# EAGLE board purple_v2 (EAGLE 8.0.0)
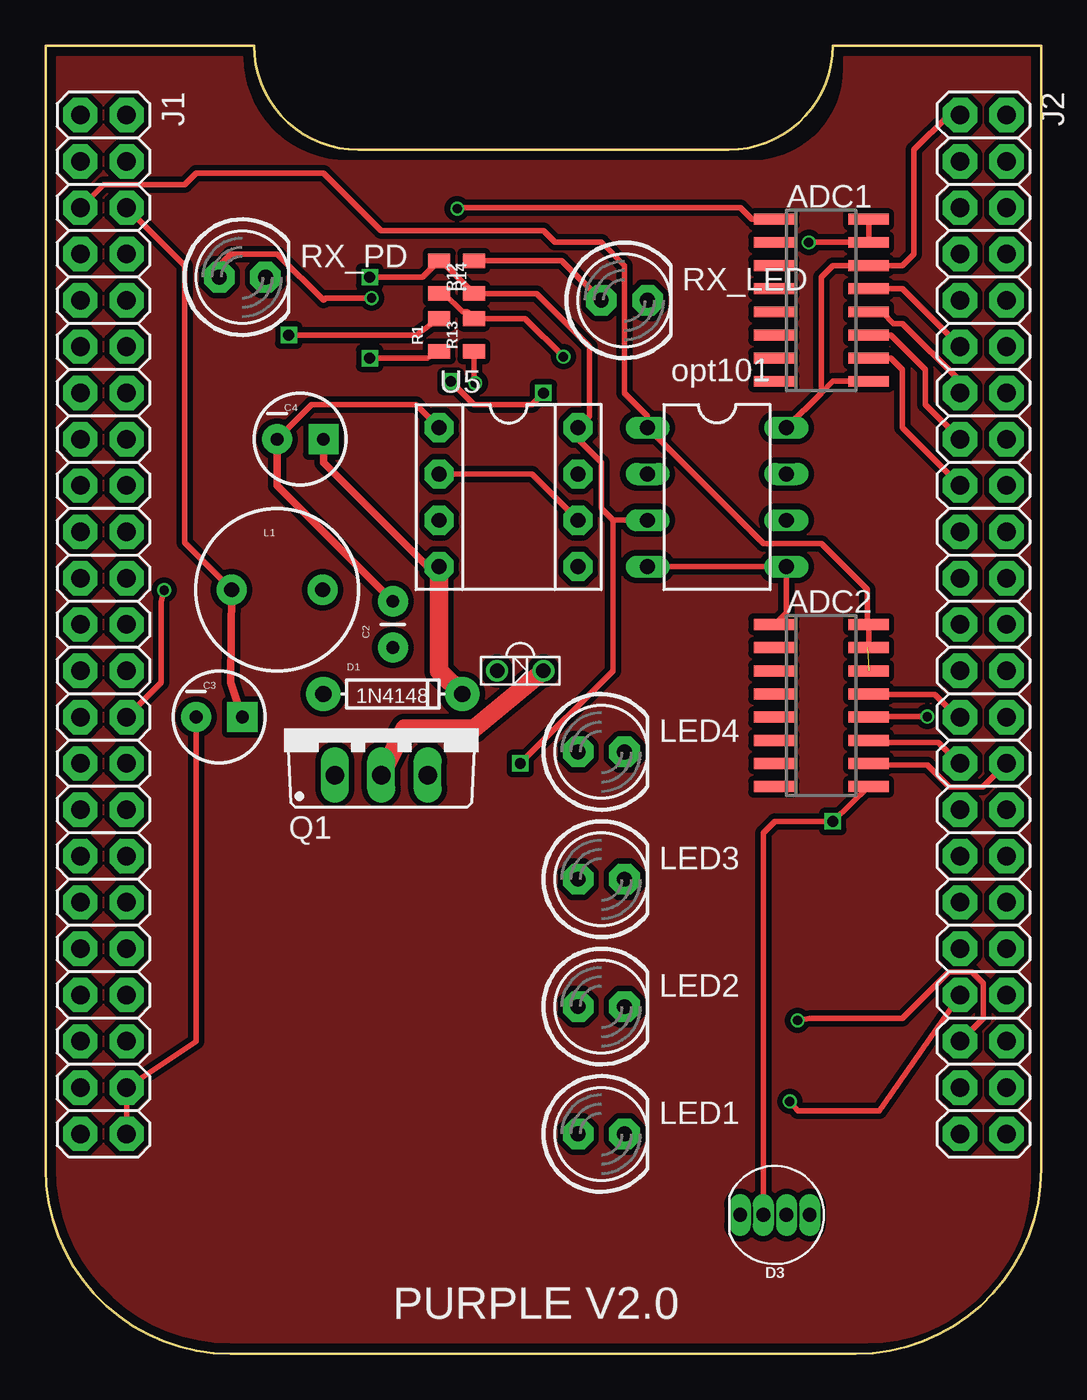
[diagram p0: board, top side]
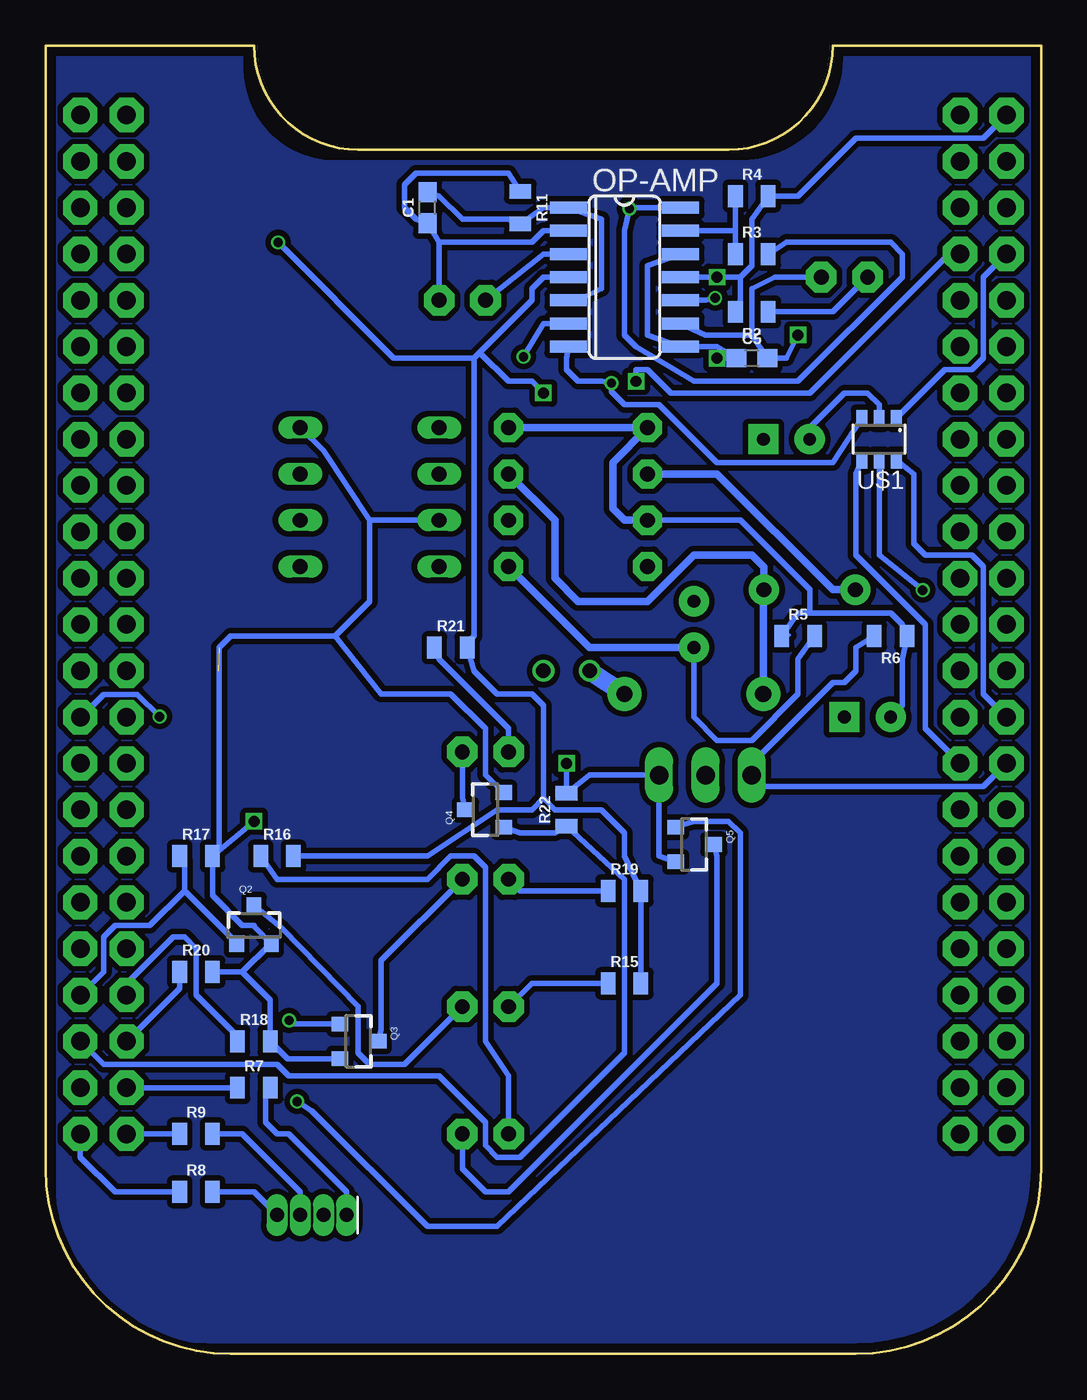
[diagram p1: board, bottom side, seen from below]

Size 54.61 x 71.75 mm. Coordinates in mm from the lower left corner, seen from the top.
Outline: 17.14,66.04 37.47,66.04 arc90 43.18,71.75 54.61,71.75 54.61,10.16 arc-90 44.45,0 10.16,0 arc-90 0,10.16 0,71.75 11.43,71.75 arc90 17.14,66.04
Copper layers (1*16): Top 0.035mm / dielectric 1.5mm / Bottom 0.035mm
Design rules "SparkFun *": minimum track width 8mil, minimum drill 20mil, track to track 8mil, track to pad 8mil, pad to pad 8mil, via to via 8mil, smd to smd 8mil, copper to edge 8mil, drill to drill 8mil, minimum pad ring 0mil, minimum via ring 5mil, stop-mask expansion 4mil, vias tented up to drill 20mil, thermal gap 10mil

## Footprints (pad centres in the part's own frame; a part is rotated, then mirrored left to right if it is on the bottom)
SO16 = smd 0.6 x 2.2: 1 -4.445,-2.6; 2 -3.175,-2.6; 3 -1.905,-2.6; 4 -0.635,-2.6; 5 0.635,-2.6; 6 1.905,-2.6; 7 3.175,-2.6; 8 4.445,-2.6; 9 4.445,2.6; 10 3.175,2.6; 11 1.905,2.6; 12 0.635,2.6; 13 -0.635,2.6; 14 -1.905,2.6; 15 -3.175,2.6; 16 -4.445,2.6
0603 = smd 1.1 x 1: 1 -0.85,0; 2 0.85,0
CAP-PTH-SMALL = drill 0.7 pad 1.651: 1 0,0; 2 2.54,0
CPOL-RADIAL-10UF-25V = drill 0.7 pad 1.651 square: 1 1.27,0 | drill 0.7 pad 1.651: 2 -1.27,0
DIODE-1N4148 = drill 0.9 pad 1.88: A -3.81,0; C 3.81,0
LTE-302 = drill 0.8: A 1.27,0; C -1.27,0
LED-RGB-THRU = drill 0.762 pad 0.889 long: 1 1.905,0; 2 0.635,0; 3 -0.635,0; 4 -1.905,0
2*23 = drill 1.016 pad 1.88 octagon: 1 -33.02,-1.27; 2 -33.02,1.27; 3 -30.48,-1.27; 4 -30.48,1.27; 5 -27.94,-1.27; 6 -27.94,1.27; 7 -25.4,-1.27; 8 -25.4,1.27; 9 -22.86,-1.27; 10 -22.86,1.27; 11 -20.32,-1.27; 12 -20.32,1.27; 13 -17.78,-1.27; 14 -17.78,1.27; 15 -15.24,-1.27; 16 -15.24,1.27; 17 -12.7,-1.27; 18 -12.7,1.27; 19 -10.16,-1.27; 20 -10.16,1.27; 21 -7.62,-1.27; 22 -7.62,1.27; 23 -5.08,-1.27; 24 -5.08,1.27; 25 -2.54,-1.27; 26 -2.54,1.27; 27 0,-1.27; 28 0,1.27; 29 2.54,-1.27; 30 2.54,1.27; 31 5.08,-1.27; 32 5.08,1.27; 33 7.62,-1.27; 34 7.62,1.27; 35 10.16,-1.27; 36 10.16,1.27; 37 12.7,-1.27; 38 12.7,1.27; 39 15.24,-1.27; 40 15.24,1.27; 41 17.78,-1.27; 42 17.78,1.27; 43 20.32,-1.27; 44 20.32,1.27; 45 22.86,-1.27; 46 22.86,1.27
RLB0912 = drill 0.813 pad 1.651: 1 2.502,0; 2 -2.502,0
LED5MM = drill 0.813 pad 1.676 octagon: A -1.27,0; K 1.27,0
SO14 = smd 0.66 x 2.032: 1 -3.81,-3.073; 2 -2.54,-3.073; 3 -1.27,-3.073; 4 0,-3.073; 5 1.27,-3.073; 6 2.54,-3.073; 7 3.81,-3.073; 8 3.81,3.073; 9 2.54,3.073; 10 1.27,3.073; 11 0,3.073; 12 -1.27,3.073; 13 -2.54,3.073; 14 -3.81,3.073
TO220BV = drill 1.016 long: D 0,-2.54; G -2.54,-2.54; S 2.54,-2.54
SOT23-3 = smd 0.8 x 0.9: 1 -0.95,-1; 2 0.95,-1; 3 0,1.1
0805 = smd 0.8 x 1.2: 1 -0.9,0; 2 0.9,0
DIL08 = drill 0.813 pad 1.6 octagon: 1 -3.81,-3.81; 2 -1.27,-3.81; 3 1.27,-3.81; 4 3.81,-3.81; 5 3.81,3.81; 6 1.27,3.81; 7 -1.27,3.81; 8 -3.81,3.81
OPT101 = drill 0.813 long: 1 -3.81,3.81; 2 -3.81,1.27; 3 -3.81,-1.27; 4 -3.81,-3.81; 5 3.81,-3.81; 6 3.81,-1.27; 7 3.81,1.27; 8 3.81,3.81
SOT23-6 = smd 0.6 x 0.9: 1 -0.95,-1.15; 2 0,-1.15; 3 0.95,-1.15; 4 0.95,1.15; 5 0,1.15; 6 -0.95,1.15

## Placement (x,y rotation side)
ADC1  MCP3008-SO16  [SO16]  42.55,57.78 270 top
ADC2  MCP3008-SO16  [SO16]  42.55,35.56 270 top
C1  10pF  [0603]  33.66,62.87 90 bottom
C2  0.1uF  [CAP-PTH-SMALL]  19.05,38.73 90 top
C3  47uF  [CPOL-RADIAL-10UF-25V]  9.53,34.92 0 top
C4  33uF  [CPOL-RADIAL-10UF-25V]  13.97,50.16 0 top
C5  10pF  [0603]  15.88,54.61 0 bottom
D1  1N4148  [DIODE-1N4148]  19.05,36.2 0 top
D2  High Power LED  [LTE-302]  26.04,37.47 180 top
D3  CLEAR  [LED-RGB-THRU]  40.01,7.62 180 top
FRAME1  [DUMMY]  0,-0.64 0 top
J1  [2*23]  3.17,34.92 270 top
J2  [2*23]  51.44,34.92 270 top
L1  33uH  [RLB0912]  12.7,41.91 0 top
LED1  [LED5MM]  30.48,12.06 0 top
LED2  [LED5MM]  30.48,19.05 0 top
LED3  [LED5MM]  30.48,26.04 0 top
LED4  [LED5MM]  30.48,33.02 0 top
OP-AMP  TLC2274-SO14  [SO14]  22.86,59.05 270 bottom
Q1  IRF520  [TO220BV]  18.41,34.29 0 top
Q2  MOSFET-PCHANNEL  [SOT23-3]  43.18,23.5 0 bottom
Q3  MOSFET-PCHANNEL  [SOT23-3]  37.47,17.14 270 bottom
Q4  MOSFET-PCHANNEL  [SOT23-3]  30.48,29.84 90 bottom
Q5  MOSFET-PCHANNEL  [SOT23-3]  19.05,27.94 270 bottom
R1  220K  [0805]  21.59,55.88 90 top
R2  1K  [0805]  15.88,57.15 180 bottom
R3  10K  [0805]  15.88,60.33 0 bottom
R4  1K  [0805]  15.88,63.5 0 bottom
R5  1M  [0805]  13.34,39.37 0 bottom
R6  10K  [0805]  8.26,39.37 180 bottom
R7  100  [0805]  43.18,14.61 0 bottom
R8  100  [0805]  46.35,8.89 0 bottom
R9  100  [0805]  46.35,12.06 0 bottom
R11  220K  [0805]  28.57,62.87 270 bottom
R12  1K  [0805]  23.5,59.05 90 top
R13  10K  [0805]  23.5,55.88 90 top
R14  1K  [0805]  21.59,59.05 270 top
R15  400  [0805]  22.86,20.32 0 bottom
R16  400  [0805]  41.91,27.3 0 bottom
R17  100K  [0805]  46.35,27.3 0 bottom
R18  100K  [0805]  43.18,17.14 0 bottom
R19  400  [0805]  22.86,25.4 0 bottom
R20  100K  [0805]  46.35,20.95 0 bottom
R21  400  [0805]  32.38,38.73 0 bottom
R22  100K  [0805]  26.04,29.84 90 bottom
RX_LED  [LED5MM]  31.75,57.78 0 top
RX_PD  [LED5MM]  10.79,59.05 0 top
U5  [DIL08]  25.4,46.99 270 top
U9  [OPT101]  36.83,46.99 0 top
U$1  ADS7883  [SOT23-6]  8.89,50.16 180 bottom

## Library data of the parts
ADC1 ADC2 LED1-LED4 OP-AMP RX_LED RX_PD = adafruit
C1 C5 = SparkFun-Capacitors; PROD_ID: CAP-11812
C2-C4 = SparkFun-Capacitors
D1 = SparkFun-DiscreteSemi
D2 = SparkFun-LED
D3 = SparkFun-LED; PROD_ID: DIO-08418
FRAME1 = SparkFun-Aesthetics; DESIGNER: Nobody; VERSION: v01
J1 J2 = header
L1 = SparkFun-Passives
Q1 = transistor-power
Q2-Q5 = User-Submitted; PROD_ID: TRANS-08285
R1-R9 R11-R22 = SparkFun-Resistors; PROD_ID: RES-11622
U5 = SparkFun-DigitalIC
U9 = TCL272
U$1 = vlc

## Nets
2IN+: C1.2 OP-AMP.1 OP-AMP.5 R11.2
4IN+: C5.1 OP-AMP.8 OP-AMP.12 R1.1
CH0: ADC1.1 OP-AMP.14 R3.2
CLK_1: ADC1.13 J2.11
CLK_PRU: J1.30 U$1.4
CS_1: ADC1.10 J2.17
CS_P8_30: ADC2.10 J2.30
CS_PRU: J1.27 U$1.6
DIN_1: ADC1.11 J2.15
DOUT_1: ADC1.12 J2.13
GND: ADC1.9 ADC1.14 ADC2.9 ADC2.14 C2.2 C3.2 C4.2 D3.2 J1.1 J1.44 J1.46 J2.1 OP-AMP.11 Q1.S Q2.2 Q3.2 Q4.2 Q5.2 R2.2 R4.2 R5.1 R6.1 R12.1 R14.1 R17.2 R18.2 R20.2 R22.2 U5.1 U5.3 U5.8 U9.3 U9.8 U$1.2
HP_LED: J1.29 Q1.G R6.2
MISO_P8_28: ADC2.12 J2.28
MISO_PRU: J1.28 U$1.5
MOSI_P8_29: ADC2.11 J2.29
N$1: D3.1 R7.2
N$2: OP-AMP.13 R3.1 R4.1
N$3: D3.4 R8.2
N$4: D3.3 R9.2
N$5: OP-AMP.10 R2.1 RX_PD.A
N$6: C5.2 OP-AMP.9 R1.2 RX_PD.K
N$8: C1.1 OP-AMP.2 R11.1 RX_LED.K
N$9: LED2.A R15.1
N$10: OP-AMP.3 R12.2 RX_LED.A
N$11: OP-AMP.6 R13.2 R14.2
N$12: LED1.A R16.1
N$13: D2.C Q1.D
N$14: ADC2.1 U9.4 U9.5
N$15: LED2.K Q2.3
N$16: LED1.K Q5.3
N$17: LED3.A R19.1
N$18: D1.A L1.1 U5.7
N$19: C4.1 D1.C D2.A U5.4
N$20: C2.1 R5.2 U5.5
N$21: LED3.K Q3.3
N$22: LED4.A R21.1
N$23: LED4.K Q4.3
P9_5: ADC2.15 ADC2.16 J1.5 U9.1
P9_6: C3.1 J1.6 L1.2 U5.2 U5.6
P9_7: J1.7 U$1.1
P9_8: ADC1.15 ADC1.16 J1.8 OP-AMP.4 R15.2 R16.2 R19.2 R21.2
RGB_B: J2.46 R8.1
RGB_G: J2.45 R9.1
RGB_R: J2.43 R7.1
SCLK_P8_27: ADC2.13 J2.27
TXLED1: J2.39 Q5.1 R18.1
TXLED2: J2.40 Q2.1 R17.1
TXLED3: J2.41 Q3.1 R20.1
TXLED4: J2.42 Q4.1 R22.1
VIN: OP-AMP.7 R13.1 U$1.3

## Tracks (layer width: path | path; a pad name or v marks a point on that pad's centre or on a via)
2IN+
  Bottom 0.203: 25.2,57.91 25.81,57.91 OP-AMP.5 | 25.2,62.79 25.81,62.79 OP-AMP.1
  Bottom 0.305: 25.2,57.91 24.13,58.42 24.13,62.23 OP-AMP.1 27.3,62.87 R11.2 29.21,62.23 31.75,62.23 33.02,63.5 C1.2
4IN+  (via drill 0.6)
  Top 0.305: R1.1 20.95,54.61 v17.78,54.61
  Bottom 0.305: OP-AMP.12 21.59,59.69 21.59,55.88 OP-AMP.8 17.78,55.24 C5.1 v17.78,54.61
CH0  (via drill 0.51)
  Top 0.203: ADC1.1 39.83,62.18
  Top 0.305: v22.58,62.81 22.63,62.87 38.1,62.87 38.73,62.23 ADC1.1
  Bottom 0.203: 20.52,62.79 19.91,62.79 OP-AMP.14 | 14.83,60.35 R3.2
  Bottom 0.305: R3.2 13.97,60.96 8.26,60.96 7.62,60.33 7.62,59.05 13.34,53.34 19.05,53.34 22.23,55.24 22.86,55.88 22.86,61.59 v22.58,62.81 22.23,62.87 OP-AMP.14
CLK_1
  Top 0.203: 45.31,58.32 ADC1.13
  Top 0.305: ADC1.13 46.99,58.42 J2.11
CLK_PRU
  Bottom 0.305: J1.30 6.35,34.29 6.35,40.01 10.16,43.81 10.16,48.26 U$1.4
CS_1
  Top 0.305: ADC1.10 46.35,54.61 46.99,53.98 46.99,50.8 J2.17
CS_P8_30
  Top 0.203: 45.31,32.31 ADC2.10
  Top 0.305: 45.31,32.31 48.36,32.31 49.58,31.09 51.41,31.09 J2.30
CS_PRU
  Bottom 0.203: U$1.6 7.92,48.97
  Bottom 0.305: J1.27 3.17,36.2 3.17,43.18 3.81,43.81 6.35,43.81 6.99,44.45 6.99,48.26 U$1.6
DIN_1
  Top 0.305: ADC1.11 46.35,55.88 48.26,53.98 48.26,52.07 J2.15
DOUT_1
  Top 0.203: 45.92,57.1 45.31,57.1 ADC1.12
  Top 0.305: J2.13 50.16,53.34 46.99,56.52 46.51,56.52 45.92,57.1
GND  (via drill 0.6)  (1 unrouted)
  Top 0.203: 45.11,53.24 ADC1.9 | 44.3,59.54 45.11,59.54 ADC1.14 45.31,59.74 45.92,59.74 | 21.74,59.94 R14.1 21.54,60.15 | 23.37,58.32 R12.1 23.57,58.12 | 12.8,50.19 C4.2 | U5.1 21.54,50.8 | 29.26,50.8 U5.8
  Top 0.305: v17.78,59.05 20.69,59.05 R14.1 21.7,59.95 R12.1 26.93,58.16 29.84,55.24 29.84,51.44 U5.8 29.21,50.16 30.48,48.9 30.48,46.35 31.11,45.72 | U5.1 20.32,52.07 14.61,52.07 C4.2 | 31.11,45.72 U9.3 | J2.1 49.53,67.94 47.62,66.04 47.62,60.33 46.99,59.69 ADC1.14 43.18,59.69 42.55,59.05 42.55,52.7 | ADC1.9 43.18,53.34 42.55,52.7 | 42.55,52.7 U9.8 | ADC2.9 v43.18,29.21 40.01,29.21 39.37,28.57 D3.2 | C3.2 8.26,17.14 J1.44 J1.46 | v26.04,32.38 31.11,37.47 31.11,45.72
  Top 0.406: C2.2 12.7,47.62 C4.2
  Bottom 0.203: 38.61,16.26 Q3.2 | 42.27,17.07 R18.2 42.47,17.27 | R20.2 45.31,21.13 | 45.31,27.23 R17.2 45.31,27.43 | 7.52,39.22 R6.1 | 13.82,39.42 14.22,39.42 R5.1 | 42.47,22.35 42.27,22.35 Q2.2 42.47,22.35
  Bottom 0.305: U$1.2 8.89,52.07 9.53,52.7 10.79,52.7 12.7,50.8 C4.2 | R17.2 45.45,25.14 43.81,23.5 43.18,23.5 43.18,23.45 Q2.2 42.27,22.5 43.81,20.95 | 43.81,20.95 R20.2 | 43.81,20.95 42.28,19.42 R18.2 41.33,16.2 Q3.2 | Q5.2 20.95,27.3 Q1.S 24.77,31.75 R22.2 v26.04,32.38 | C3.2 7.62,35.56 7.62,38.1 R6.1 7.62,40.01 8.26,40.64 12.7,40.64 | R5.1 13.34,40.64 12.7,40.64 | 12.7,40.64 12.7,41.91 16.51,45.72 U5.3 | 36.83,45.72 U9.3 | 36.83,45.72 39.37,49.53 U9.8 | R17.2 45.09,27.94 45.09,38.73 44.45,39.37 38.73,39.37 | 36.83,45.72 36.83,41.27 38.73,39.37 | Q4.2 30.48,31.75 30.48,34.29 32.38,36.2 36.2,36.2 38.73,39.37 | J1.1 3.17,66.67 10.16,66.67 13.34,63.5 R4.2 15.88,62.23 15.88,59.69 16.51,59.05 | 16.51,59.05 v17.78,59.05 OP-AMP.11 | R2.2 16.51,57.78 16.51,59.05 | R17.2 v43.18,29.21
  Bottom 0.406: U5.8 U5.1 23.5,48.9 23.5,46.35 22.86,45.72 U5.3
HP_LED
  Bottom 0.305: J1.29 3.17,31.11 15.24,31.11 Q1.G 15.88,32.38 11.43,36.83 10.79,36.83 10.16,37.47 10.16,38.73 R6.2
MISO_P8_28  (via drill 0.51)
  Top 0.203: 45.31,34.95 ADC2.12
  Top 0.305: v48.36,34.95 45.31,34.95
  Bottom 0.203: 52.63,34.95 J2.28
  Bottom 0.305: v48.36,34.95 49.58,36.17 51.41,36.17 52.63,34.95
MISO_PRU  (via drill 0.51)
  Top 0.305: J1.28 6.35,36.83 6.35,41.27 v6.5,41.88
  Bottom 0.203: 8.74,48.97 U$1.5
  Bottom 0.305: U$1.5 8.89,43.81 v6.5,41.88
MOSI_P8_29
  Top 0.203: 45.31,33.53 ADC2.11 | 49.99,32.51 J2.29
  Top 0.305: 45.31,33.53 48.97,33.53 49.99,32.51
N$1
  Bottom 0.203: R7.2 42.27,14.43
  Bottom 0.305: D3.1 38.1,8.89 41.27,12.06 41.91,12.06 42.55,12.7 42.55,14.34 R7.2
N$2
  Bottom 0.203: R3.1 16.87,60.35 | 16.87,63.4 R4.1 | 19.71,61.77 OP-AMP.13
  Bottom 0.305: 16.77,61.59 R4.1 | 16.77,61.59 R3.1 | OP-AMP.13 16.77,61.59
N$3
  Bottom 0.203: R8.2 45.31,8.74
  Bottom 0.305: D3.4 43.18,8.89 R8.2
N$4
  Bottom 0.203: R9.2 45.31,11.99
  Bottom 0.305: D3.3 40.64,8.89 43.81,12.06 R9.2
N$5  (via drill 0.51)
  Top 0.305: RX_PD.A 9.53,59.69 10.16,60.33 12.7,60.33 15.24,57.78 15.37,57.91 v17.88,57.91
  Bottom 0.203: R2.1 14.83,57.3 | OP-AMP.10 19.71,57.91
  Bottom 0.305: R2.1 11.43,57.15 RX_PD.A | v17.88,57.91 18.41,57.78 OP-AMP.10
N$6  (via drill 0.6)
  Top 0.305: R1.2 20.32,55.88 v13.34,55.88
  Bottom 0.203: 19.71,56.49 OP-AMP.9
  Bottom 0.305: RX_PD.K 14.61,59.05 15.88,58.42 15.88,55.88 | 15.88,55.88 C5.2 13.97,54.61 v13.34,55.88 | OP-AMP.9 18.41,55.88 15.88,55.88
N$8
  Bottom 0.203: C1.1 33.53,61.98 | 26.01,61.57 OP-AMP.2
  Bottom 0.305: R11.1 29.21,64.77 34.29,64.77 34.92,64.14 34.92,62.87 34.29,62.23 C1.1 33.02,60.96 | OP-AMP.2 27.3,61.59 27.94,60.96 33.02,60.96 | RX_LED.K 33.02,60.96
N$9
  Bottom 0.305: R15.1 27.94,20.32 LED2.A
N$10
  Top 0.305: R12.2 28.31,59.95 RX_LED.A
  Bottom 0.305: OP-AMP.3 27.3,60.33 RX_LED.A
N$11  (via drill 0.51)
  Top 0.203: 21.95,58.12 21.74,58.12 R14.2 | 23.37,56.69 R13.2 23.57,56.69
  Top 0.305: R14.2 21.86,58.16 22.86,57.15 23.12,57.15 R13.2 26.3,56.78 v28.4,54.69
  Bottom 0.203: 25.4,56.49 25.81,56.49 OP-AMP.6
  Bottom 0.305: OP-AMP.6 27.3,56.52 v28.4,54.69
N$12
  Bottom 0.203: R16.1 42.67,27.23
  Bottom 0.305: LED1.A 29.21,15.24 30.48,17.14 30.48,26.67 31.11,27.3 32.38,27.3 33.66,26.04 41.91,26.04 R16.1
N$13
  Top 1.016: D2.C 23.5,34.29 19.68,34.29 Q1.D
N$14
  Top 0.203: 40.03,40.03 ADC2.1
  Top 0.305: U9.4 U9.5 40.64,40.64 40.01,40.01 ADC2.1
N$15
  Bottom 0.203: 43.08,24.59 Q2.3
  Bottom 0.305: LED2.K 34.92,15.88 36.83,15.88 37.47,16.51 37.47,19.05 41.66,23.37 Q2.3
N$16
  Bottom 0.203: Q5.3 18.09,27.84
  Bottom 0.305: LED1.K 31.75,10.16 30.48,8.89 29.21,8.89 17.78,20.32 17.78,27.3 Q5.3
N$17
  Bottom 0.305: R19.1 28.57,25.4 LED3.A
N$18
  Bottom 0.406: D1.A 15.24,41.87 L1.1 15.2,43.14 15.88,43.81 19.05,43.81 21.59,41.27 25.4,41.27 26.67,42.55 26.67,45.72 U5.7
N$19
  Top 0.406: C4.1 15.24,48.9 20.95,43.18 U5.4
  Top 1.016: U5.4 21.59,37.47 D1.C
  Bottom 1.016: D2.A D1.C
N$20
  Bottom 0.203: 12.6,39.22 R5.2
  Bottom 0.305: R5.2 13.34,38.1 13.34,36.2 15.88,33.66 17.78,33.66 19.05,34.92 C2.1
  Bottom 0.406: C2.1 24.77,38.73 U5.5
N$21
  Bottom 0.203: Q3.3 36.17,17.27
  Bottom 0.305: LED3.K 36.2,21.59 36.2,17.78 Q3.3
N$22
  Bottom 0.305: LED4.A 29.21,34.29 33.02,38.1 R21.1
N$23
  Bottom 0.203: Q4.3 31.7,29.87
  Bottom 0.305: LED4.K 31.75,30.48 Q4.3
P9_5
  Top 0.203: ADC2.15 45.11,38.81 | 45.11,39.83 ADC2.16 45.11,40.03 | 33.12,50.8 U9.1
  Top 0.305: J1.5 3.17,64.14 7.62,64.14 8.26,64.77 15.24,64.77 18.41,61.59 27.3,61.59 27.94,60.96 30.48,60.96 31.75,59.69 31.75,52.7 33.02,51.44 U9.1 39.37,44.45 42.55,44.45 45.09,41.91 45.09,40.06 ADC2.16 ADC2.15
P9_6
  Top 0.305: U5.2 26.67,48.26 U5.6 | J1.6 7.62,59.69 7.62,44.49 L1.2
  Top 0.406: L1.2 10.16,36.83 C3.1
  Bottom 0.406: U5.2 17.78,48.26 11.43,41.91 L1.2 10.16,41.87
P9_7
  Bottom 0.305: J1.7 3.17,59.05 3.17,54.61 3.81,53.98 5.28,53.98 U$1.1
P9_8  (via drill 0.51, 0.6)
  Top 0.203: ADC1.16 45.11,62.18 | 45.11,60.96 ADC1.15
  Top 0.305: v22.23,53.34 23.5,52.07 26.67,52.07 v27.3,52.7 | v41.86,60.96 ADC1.15 ADC1.16
  Bottom 0.203: 22.15,20.32 R15.2 | 26.62,58.93 26.01,58.93 OP-AMP.4
  Bottom 0.305: J1.8 5.08,60.33 12.7,52.7 20.32,52.7 21.59,53.98 22.23,53.98 v22.23,53.34 | 26.62,58.93 26.75,59.05 27.3,59.05 27.94,58.42 27.94,57.78 30.8,54.93 | 30.8,54.93 31.11,54.61 | 31.11,54.61 35.51,54.61 v41.86,60.96 | 31.11,54.61 31.11,39.37 31.48,39 R21.2 31.11,37.47 29.84,36.2 27.94,36.2 27.3,35.56 27.3,30.48 | R15.2 R19.2 22.86,27.3 22.86,28.57 24.13,29.84 26.67,29.84 27.3,30.48 | R16.2 33.66,27.3 29.84,29.84 27.94,29.84 27.3,30.48 | v27.3,52.7 27.94,53.34 29.21,53.34 30.8,54.93
P9_46
  pour Top (isolate 0.305): 0.64,71.12 10.79,71.12 arc90 16.51,65.41 38.73,65.41 arc90 43.81,70.48 43.81,71.12 53.98,71.12 53.98,9.53 arc-90 45.09,0.64 10.16,0.64 arc-90 0.64,10.16
  pour Bottom (isolate 0.305): 0.64,71.12 10.79,71.12 arc90 16.51,65.41 17.14,65.41 38.73,65.41 arc90 43.81,70.48 43.81,71.12 53.98,71.12 53.98,8.89 arc-90 45.72,0.64 44.45,0.64 10.16,0.64 arc-90 0.64,10.16 0.64,10.79
RGB_B
  Bottom 0.203: 47.35,8.94 R8.1
  Bottom 0.305: J2.46 52.7,10.79 50.8,8.89 R8.1
RGB_G
  Bottom 0.203: 47.35,11.99 R9.1
  Bottom 0.305: R9.1 J2.45
RGB_R
  Bottom 0.203: 44.09,14.63 R7.1
  Bottom 0.305: R7.1 J2.43
SCLK_P8_27
  Top 0.203: 45.31,36.17 ADC2.13
  Top 0.305: 45.31,36.17 48.77,36.17 49.99,34.95 J2.27
TXLED1  (via drill 0.51)
  Top 0.305: J2.39 45.72,13.34 41.27,13.34 v40.82,13.84
  Bottom 0.203: 19.91,28.85 Q5.1
  Bottom 0.305: R18.1 44.08,17.41 46.35,19.68 46.35,22.23 46.99,22.86 47.62,22.86 50.16,20.32 J2.39 | Q5.1 19.05,29.21 17.14,29.21 16.51,28.57 16.51,19.68 29.84,6.99 33.66,6.99 40.01,13.34 v40.82,13.84
TXLED2
  Bottom 0.305: Q2.1 44.13,22.54 46.99,25.4 | 46.99,25.4 46.99,27.04 R17.1 | J2.40 51.44,20.95 51.44,22.86 50.8,23.5 48.9,23.5 46.99,25.4
TXLED3  (via drill 0.51)
  Top 0.203: J2.41 50.19,17.27
  Top 0.305: v41.25,18.29 41.91,18.41 46.99,18.41 49.53,20.95 50.8,20.95 51.44,20.32 51.44,18.41 J2.41
  Bottom 0.203: 38.61,18.29 Q3.1
  Bottom 0.305: R20.1 47.26,20.05 J2.41 | Q3.1 41.06,18.09 v41.25,18.29
TXLED4
  Bottom 0.203: 29.46,28.85 Q4.1 | 26.21,28.85 R22.1 26.01,28.85 25.6,28.85
  Bottom 0.305: J2.42 51.44,15.88 41.91,15.88 41.27,15.24 33.02,15.24 30.48,12.7 30.48,11.43 29.84,10.79 28.57,10.79 22.86,16.51 22.86,26.04 R22.1 26.67,28.57 28.57,28.57 Q4.1
VIN  (via drill 0.51)
  Top 0.203: 23.57,54.86 R13.1
  Top 0.305: R13.1 23.5,53.31 v23.57,53.24
  Bottom 0.203: 9.96,51.21 U$1.3 | OP-AMP.7 25.81,55.07
  Bottom 0.305: OP-AMP.7 26.04,54.61 26.04,53.98 25.4,53.34 24.13,53.34 v23.57,53.24 23.57,52.78 22.86,52.07 20.95,52.07 17.78,48.9 11.43,48.9 U$1.3

## Text on the board
tPlace: PURPLE V2.0